# Altium PCB Clock_Mezzanine.PcbDoc
Units mm, origin at the board's own origin, x right, y up, seen from the top; angles counter-clockwise.
Board outline 43 x 80 mm, 2 copper layers (Top Layer, Bottom Layer), stack 1.071 mm thick; 9 components, 39 nets, 62 pads, 0 vias.
Unrouted connection lines stored in the file: 16.
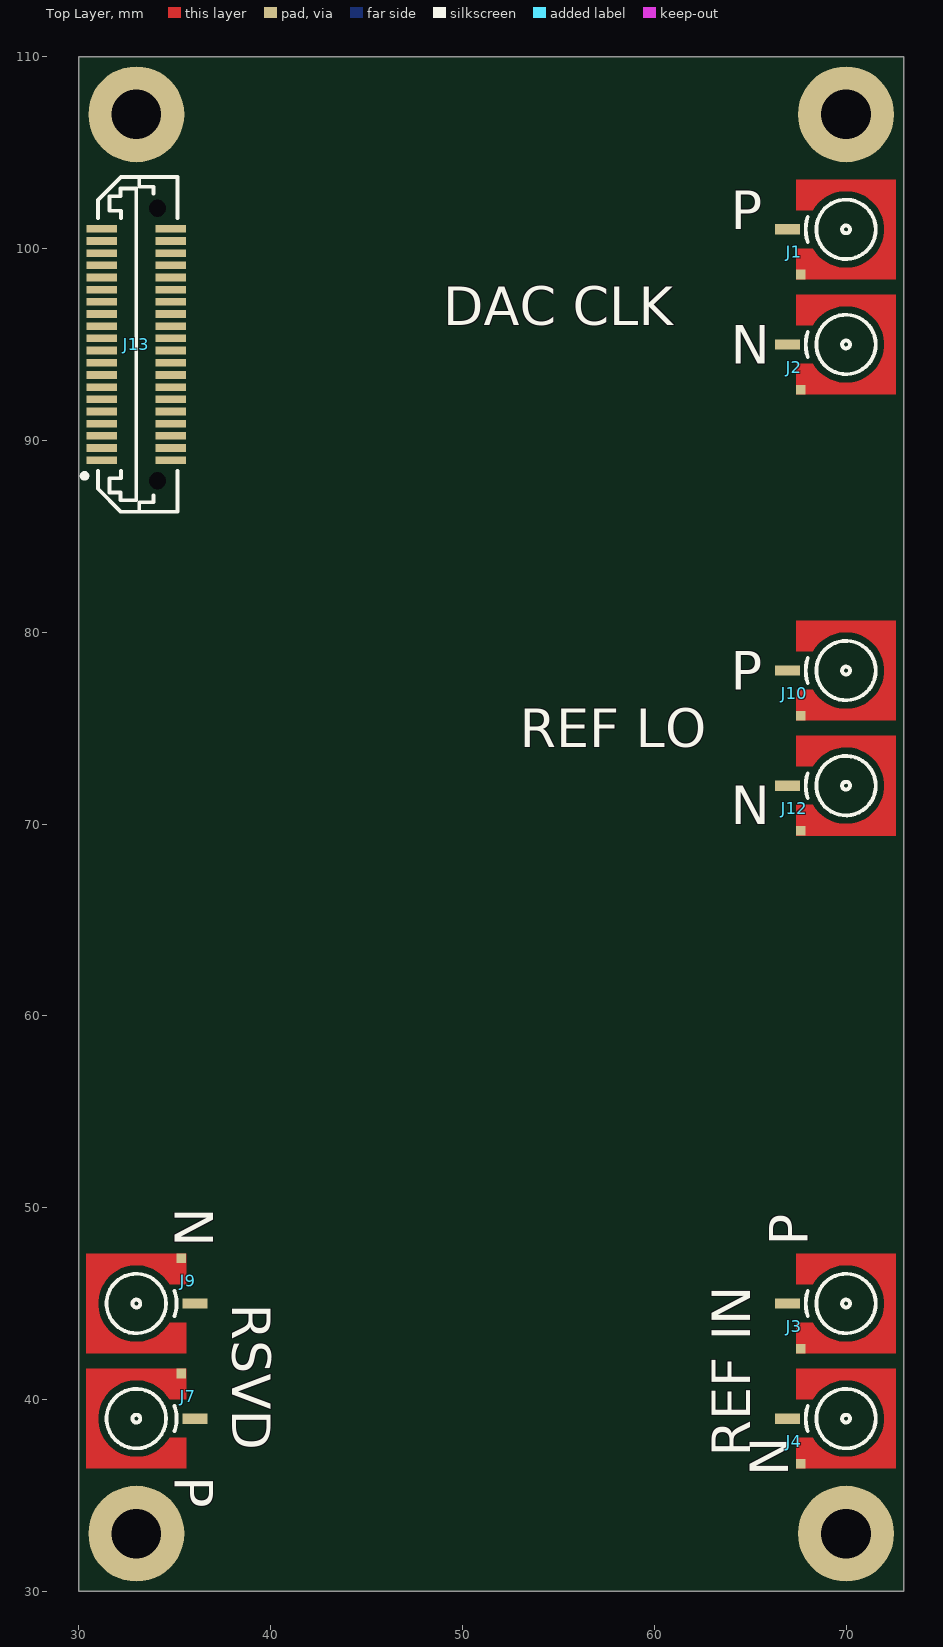
[diagram p0: Top Layer view]
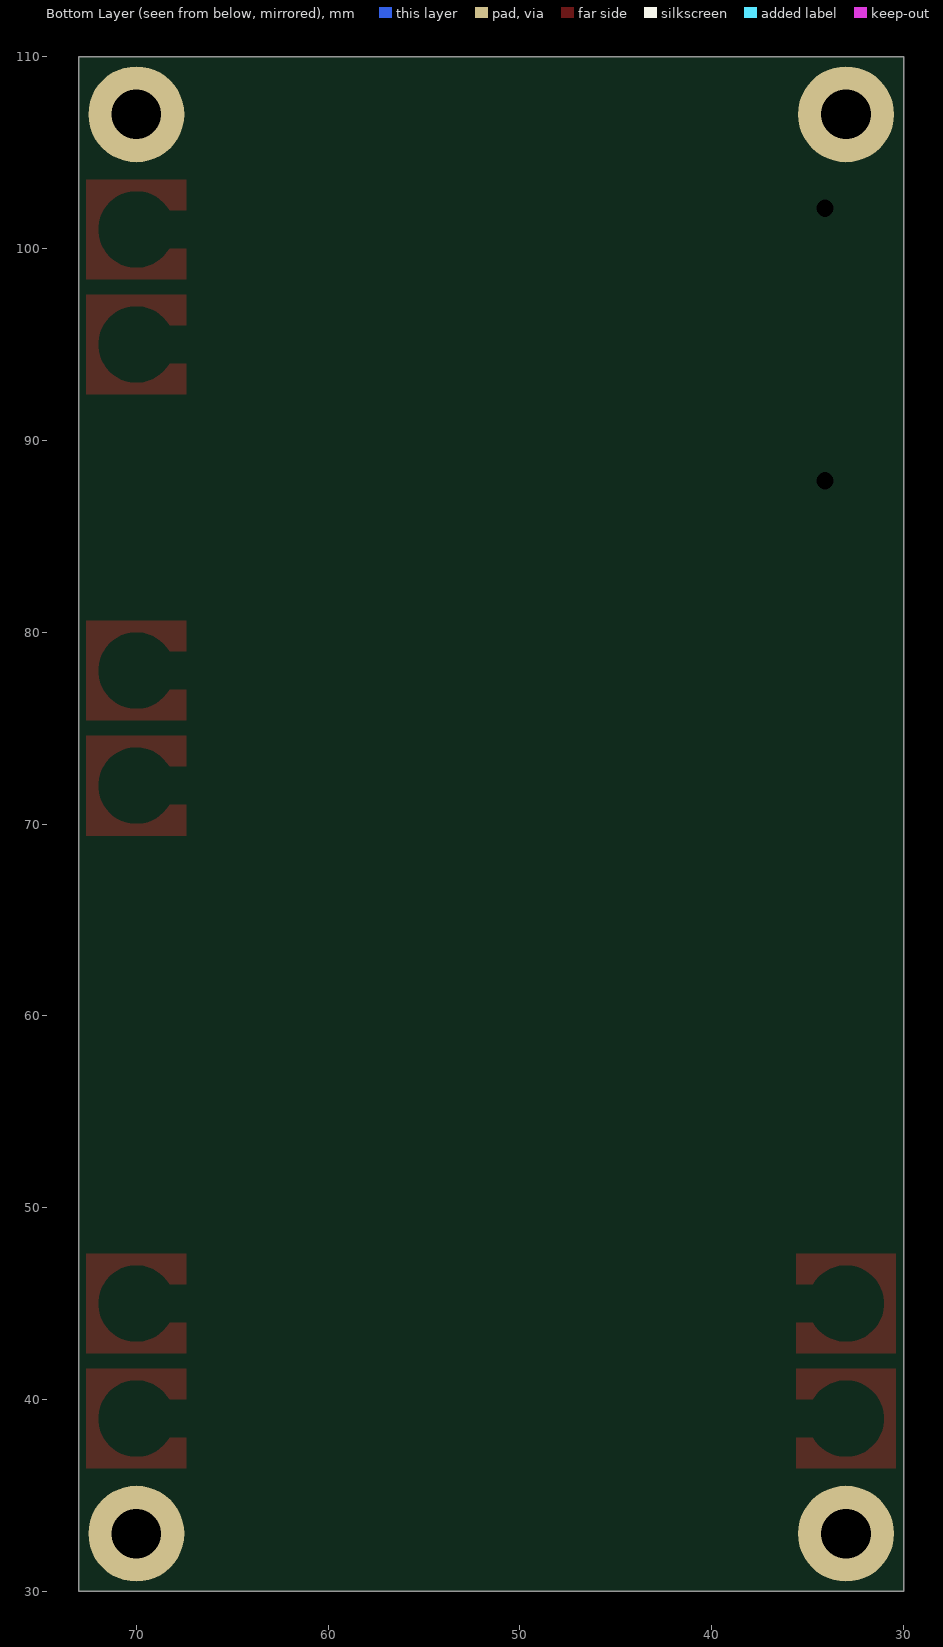
[diagram p1: Bottom Layer view, seen from below]

## Layer stack, top to bottom
Top Solder: solder mask 0.0102, Solder Resist, Dk 3.5
Top Layer: signal copper 0.0356
Dielectric1: core 1, FR-4, Dk 4.8
Bottom Layer: signal copper 0.0356
Bottom Solder: solder mask 0.0102, Solder Resist, Dk 3.5

## Board outline
30,30 30,110 73,110 73,30

## Design rules (kind name [scope] priority, off if disabled: settings)
Clearance [All] p1: gap=0.254
DiffPairsRouting [All] p1: maxlimit=0.254 minlimit=0.254 mostfreqgap=0.254 toplayer_minwidth=0.381 toplayer_maxwidth=0.381 toplayer_prefwidth=0.381 bottomlayer_minwidth=0.381 bottomlayer_maxwidth=0.381 bottomlayer_prefwidth=0.381 maxuncoupledlength=12.7
PolygonConnect [All] p1: connectstyle=Relief reliefconductorwidth=0.254 reliefentries=4 polygonreliefangle="90 Angle" airgapwidth=0.254
RoomDefinition Clock_Mezzanine [InComponentClass('Clock_Mezzanine')] p1: confinementstyle=ConfineIn formatcopy=TRUE lockcomponents=FALSE outline 74,32 80,32 80,55 74,55
RoutingVias [All] p1: holewidth=0.711 width=1.27 viastyle="Through Hole" minholewidth=0.711 minwidth=1.27 maxholewidth=0.711 maxwidth=1.27
SilkToSolderMaskClearance SilkscreenOverComponentPads [IsPad] p1: minsilkscreentomaskgap=0.254 clearancetoexposedcopper=TRUE
SolderMaskExpansion [All] p1: expansion=0.102
Width [All] p1: maxlimit=0.254 minlimit=0.254 preferedwidth=0.254
28 further rules are at their usual default settings.

## Classes and differential pairs
differential pair RESERVED: +RESERVED_P -RESERVED_N
differential pair REF_LO_OUT: +REF_LO_OUT_P -REF_LO_OUT_N
differential pair REF_CLK_IN: +REF_CLK_IN_P -REF_CLK_IN_N
differential pair DAC_CLK_OUT: +DAC_CLK_OUT_P -DAC_CLK_OUT_N

## Components (designator, comment, footprint, x,y, rotation, side; value= is the part's Value field where it differs from the comment)
J1 "SMP" MOLEX_85305-0232 70,101 r90 top locked
J2 "SMP" MOLEX_85305-0232 70,95 r90 top locked
J3 "SMP" MOLEX_85305-0232 70,45 r90 top locked
J4 "SMP" MOLEX_85305-0232 70,39 r90 top locked
J7 "SMP" MOLEX_85305-0232 33,39 r270 top locked
J9 "SMP" MOLEX_85305-0232 33,45 r270 top locked
J10 "SMP" MOLEX_85305-0232 70,78 r90 top locked
J12 "SMP" MOLEX_85305-0232 70,72 r90 top locked
J13 "Familly" SAMTEC_LSS-120-03-L-DV-A 33,95 r270 top locked

## Footprints (in the part's own frame and the unit in brackets; to place one, negate y for a bottom-side part, rotate by r counter-clockwise, add the part's x,y. Pads: shape width x height; smd on the part's side, far side on the other; paste and mask are expansions set on the pad)
MOLEX_85305-0232 [mm] "50 Ohms, SMP Surface Mount Plug, Limited Detent"
  rect 0.54x1.3 smd: 1(0,3.05)
  rect 0.5x0.5 smd paste-0.25 mask-0.25: 2(-2.35,2.35)
  Top Layer region: -2.6,-2.6 -2.6,2.6 -1,2.6 -1,1.732 -1.732,1 -2,0 -1.732,-1 -1,-1.732 0,-2 1,-1.732 1.732,-1 2,0 1.732,1 1,1.732 1,1.732 1,2.6 2.6,2.6 2.6,-2.6
  silkscreen extent -1.55,-1.55 1.55,2.1, body extent -2.54,-2.54 2.54,3.54, height 4.1
SAMTEC_LSS-120-03-L-DV-A [mm] "40 Contacts, Pitch 0.635mm, Razor Beam LSS Vertical High Speed Hermaphroditic Strip (Lead Style 5.49mm)"
  rect 0.4x1.6 smd: 1(6.032,-1.8) 2(6.032,1.8) 3(5.397,-1.8) 4(5.397,1.8) 5(4.763,-1.8) 6(4.763,1.8) 7(4.127,-1.8) 8(4.127,1.8) 9(3.492,-1.8) 10(3.492,1.8) 11(2.858,-1.8) 12(2.857,1.8) 13(2.223,-1.8) 14(2.222,1.8) 15(1.588,-1.8) 16(1.587,1.8) 17(0.953,-1.8) 18(0.952,1.8) 19(0.318,-1.8) 20(0.317,1.8) 21(-0.317,-1.8) 22(-0.318,1.8) 23(-0.952,-1.8) 24(-0.953,1.8) 25(-1.587,-1.8) 26(-1.588,1.8) 27(-2.222,-1.8) 28(-2.223,1.8) 29(-2.857,-1.8) 30(-2.858,1.8) 31(-3.492,-1.8) 32(-3.492,1.8) 33(-4.127,-1.8) 34(-4.127,1.8) 35(-4.763,-1.8) 36(-4.763,1.8) 37(-5.397,-1.8) 38(-5.397,1.8) 39(-6.032,-1.8) 40(-6.032,1.8)
  round 0.5 hole 0.9 unplated mask+0.2: P1(-7.1,1.1) P2(7.1,1.1)
  silkscreen extent -8.72,-2.82 8.72,2.14, body extent -8.72,-2.3 8.73,2.3, height 5.3

## Part data
J1 J2 J3 J4 J7 J9 J10 J12: library part MOLEX_85305-0232
J13: library part SAMTEC_LSS-120-03-L-DV-A, "Connector 40 Hermaphroditic"

## Free pads (board coordinates)
  round 5 hole 2.6: 0(33,33) 0(33,107) 0(70,33) 0(70,107)

## Nets (pads, with @x,y where several pads share a name; then routed paths per layer and width w, separated by ;. In a path a pad name is that pad's centre, name@x,y a point inside that pad or via, vN(x,y) a via of type N, cw(c..) or ccw(c..) an arc to the next point about the centre after c; other vN are vias at no path point)
ADC_CH0: 
ADC_CH1: 
ADC_CH2: 
ADC_CH3: 
DAC_CLK_OUT_N: J2.1
DAC_CLK_OUT_P: J1.1
GND: J1.2 J2.2 J3.2 J4.2 J7.2 J9.2 J10.2 J12.2 J13.1 J13.2 J13.23 J13.24 J13.29 J13.30 J13.35 J13.36
MEZZ_IO0: J13.3
MEZZ_IO1: J13.4
MEZZ_IO2: J13.5
MEZZ_IO3: J13.6
MEZZ_IO4: J13.7
MEZZ_IO5: J13.8
MEZZ_IO6: J13.9
MEZZ_IO7: J13.10
MEZZ_IO8: J13.11
MEZZ_IO9: J13.12
MEZZ_IO10: J13.13
MEZZ_IO11: J13.14
MEZZ_IO12: J13.15
MEZZ_IO13: J13.16
MEZZ_IO14: J13.17
MEZZ_IO15: J13.18
N5V0A: 
N6V0A: J13.31
N12V0A: J13.25
P3V3: J13.19
P5V0A: 
P6V0A: J13.32 J13.34
P12V0A: J13.26
REF_CLK_IN_N: J4.1
REF_CLK_IN_P: J3.1
REF_LO_OUT_N: J12.1
REF_LO_OUT_P: J10.1
RESERVED_N: J9.1
RESERVED_P: J7.1
SCL: J13.21
SDA: J13.22
VCM: J13.33
pads on no net: J13.20 J13.27 J13.28 J13.37 J13.38 J13.39 J13.40 J13.P1 J13.P2

## Silkscreen, mask and mechanical layers (free items; w line width, h text height)
Top Overlay:
  text "P" at 64,101 h2
  text "DAC CLK" at 49,96 h2
  text "N" at 64,94 h2
  text "P" at 64,77 h2
  text "REF LO" at 53,74 h2
  text "N" at 64,70 h2
  text "N" at 35,50 h2 r270
  text "P" at 68,48 h2 r90
  text "RSVD" at 38,45 h2 r270
  text "REF IN" at 65,37 h2 r90
  text "P" at 35,36 h2 r270
  text "N" at 67,36 h2 r90
Mechanical 1:
  lines w0.05: 30,30 33,30 73,30 73,110 30,110 30,30